# Altium PCB FiltrosGyrator_PCB.PcbDoc
Units mm, origin at the board's own origin, x right, y up, seen from the top; angles counter-clockwise.
Board outline 47.27 x 46.55 mm, 2 copper layers (Top Layer, Bottom Layer); 37 components, 19 nets, 83 pads, 0 vias.
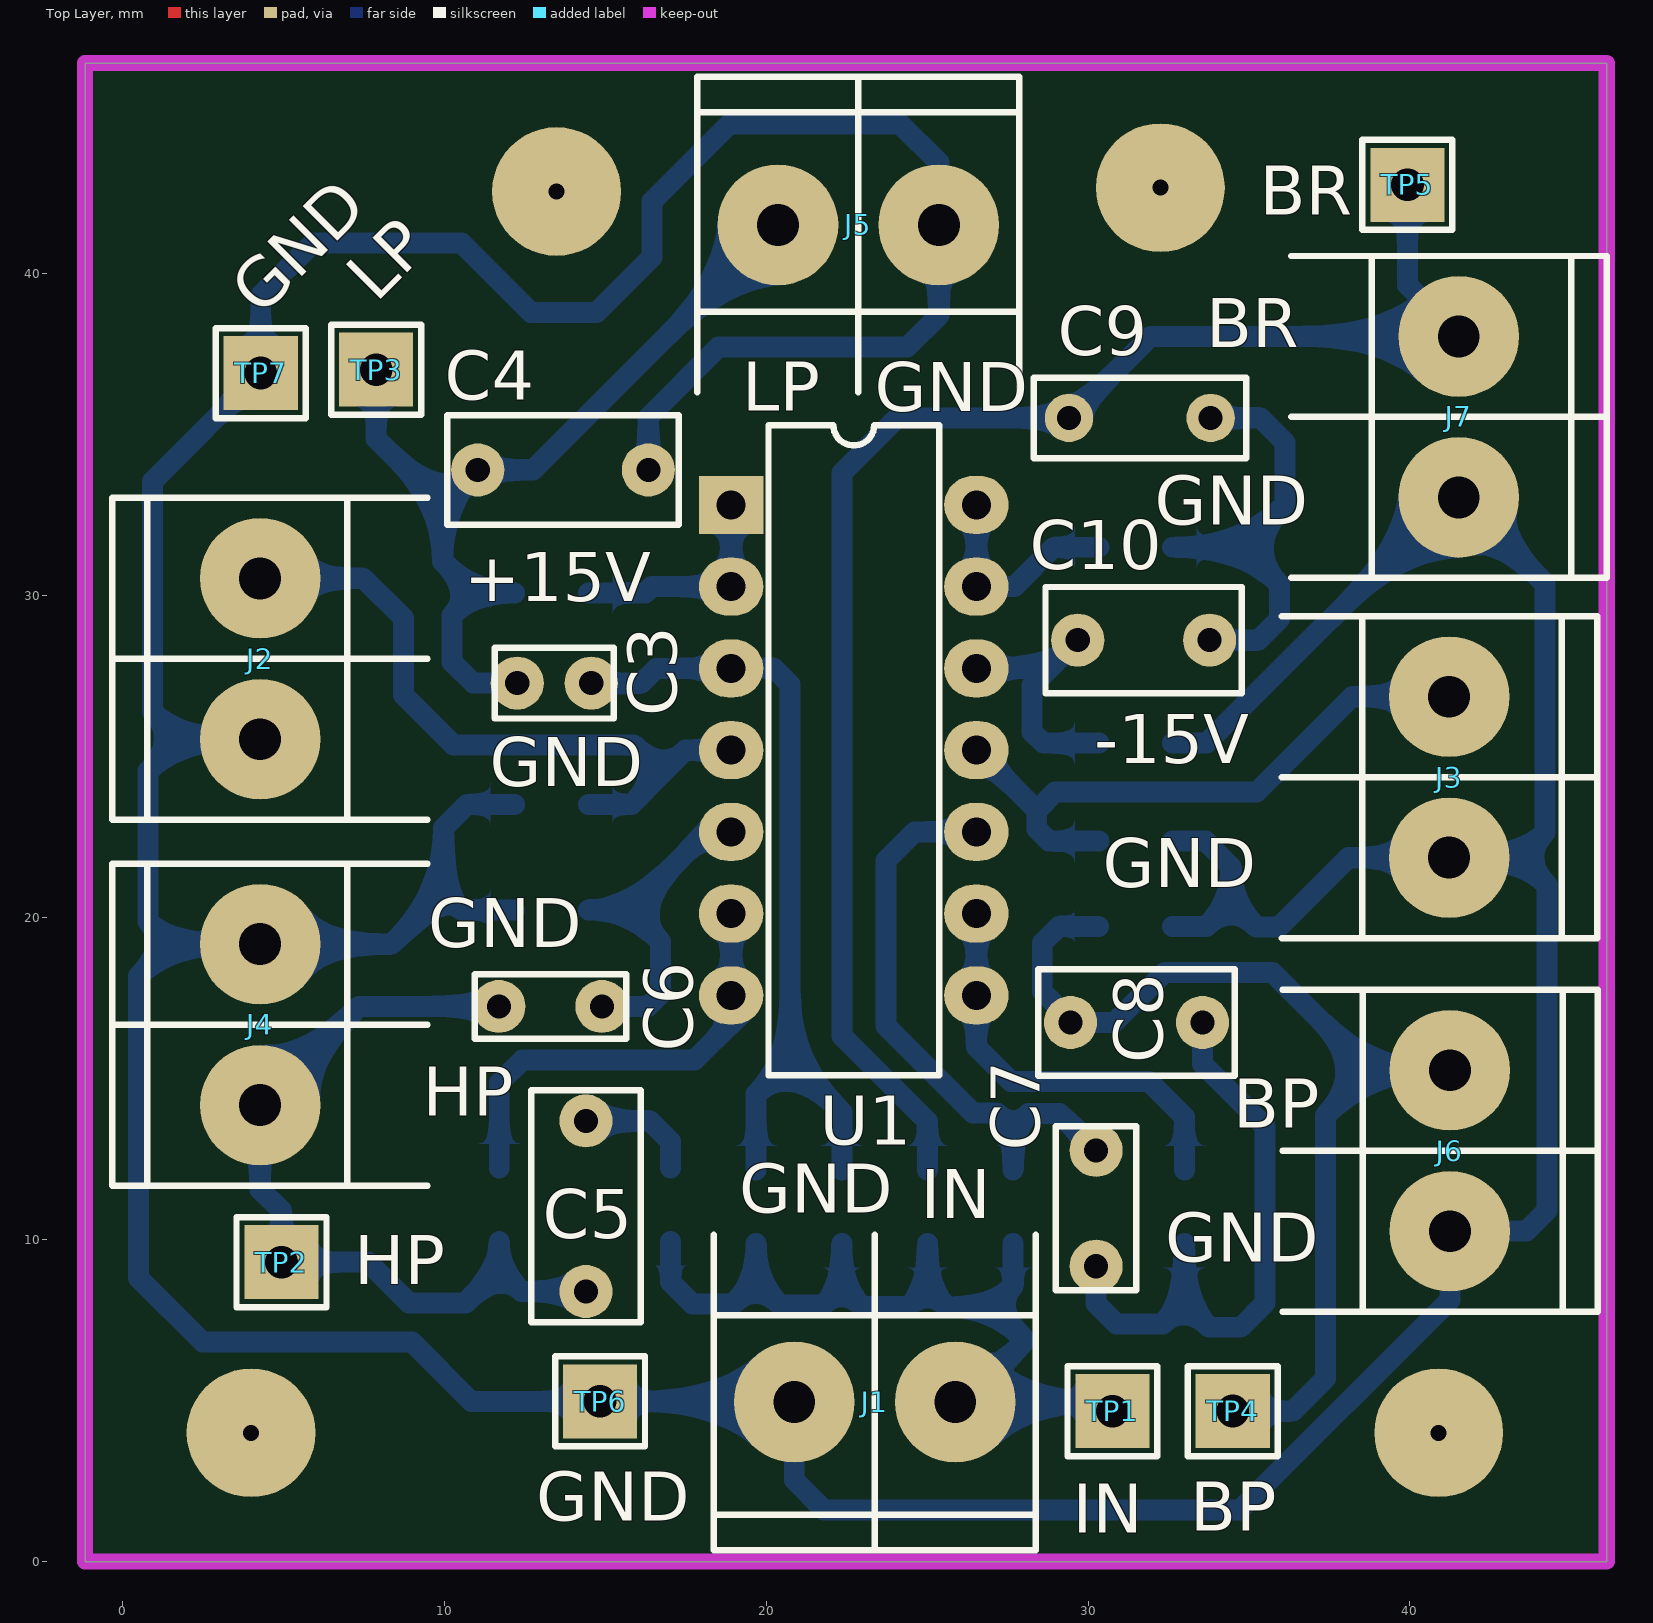
[diagram p0: Top Layer view]
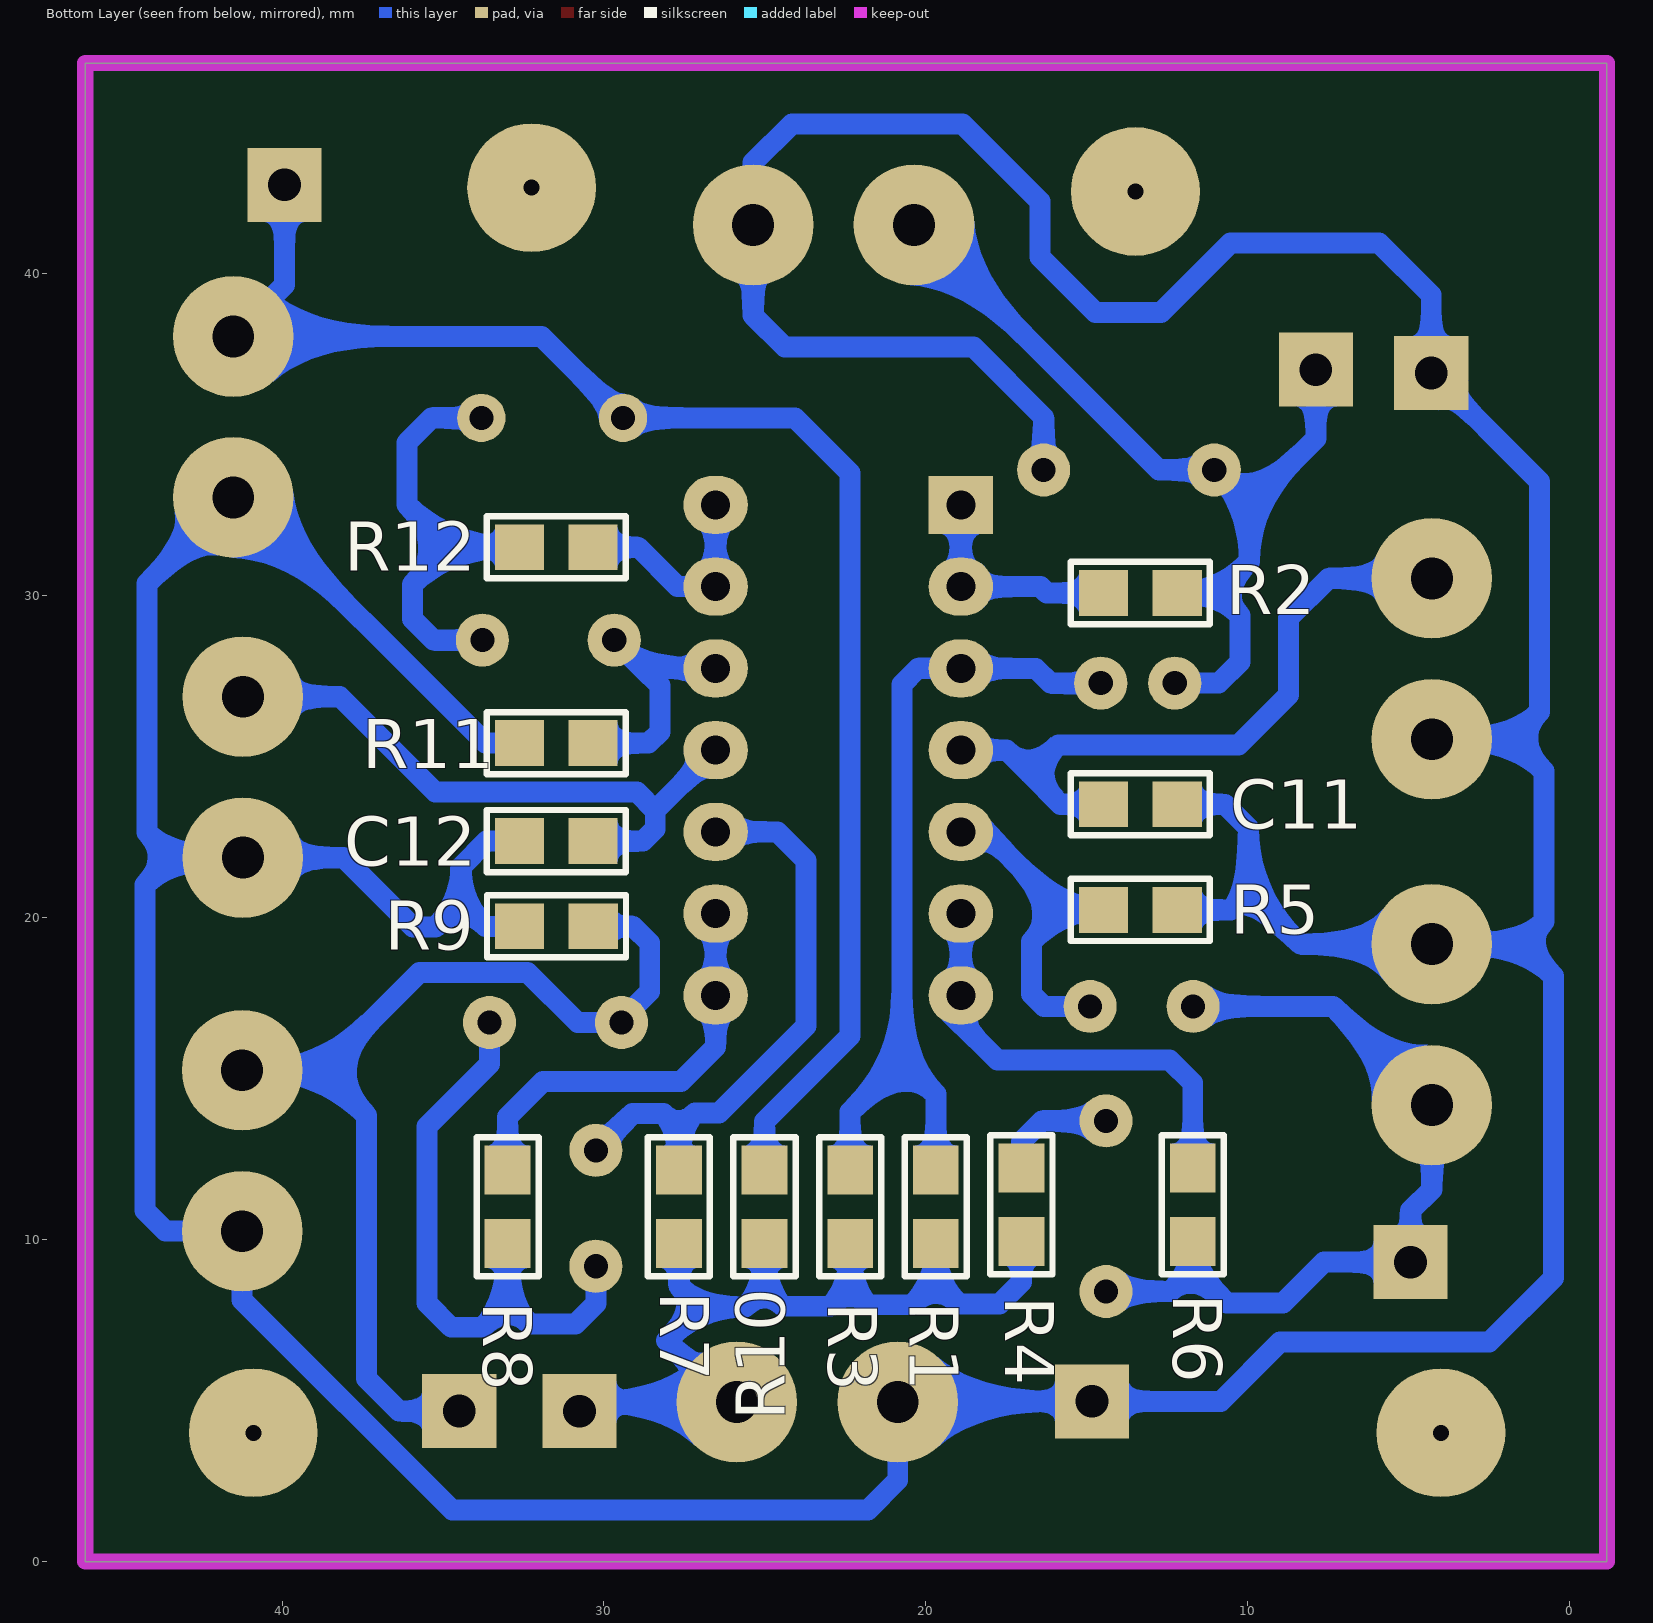
[diagram p1: Bottom Layer view, seen from below]
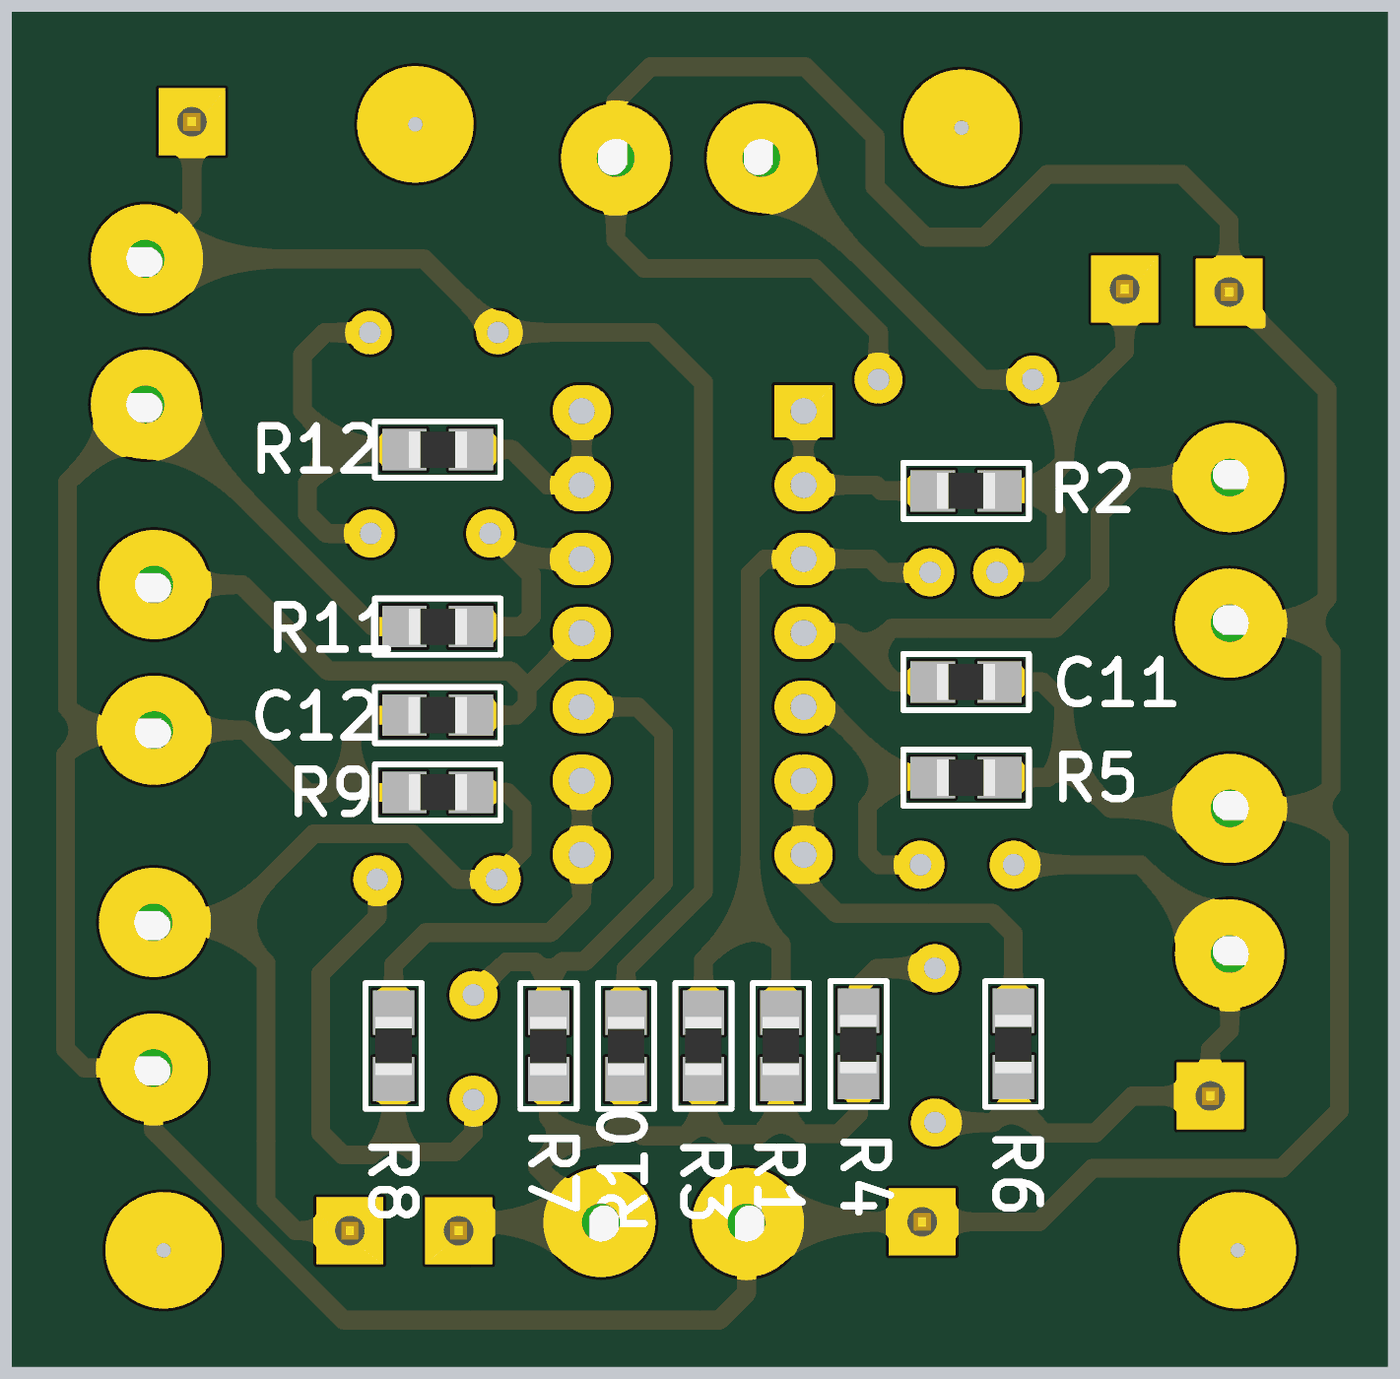
[diagram p2: 3D render of the assembled board from below, using the file's embedded part models]

## Layer stack, top to bottom
Top Solder: solder mask 0.0102, Solder Resist, Dk 3.5
Top Layer: signal copper 0.0356
Dielectric 1: dielectric 0.32, FR-4, Dk 4.8
Bottom Layer: signal copper 0.0356
Bottom Solder: solder mask 0.0102, Solder Resist, Dk 3.5

## Board outline
-1.153,0 46.114,0 46.114,46.548 -1.153,46.548

## Design rules (kind name [scope] priority, off if disabled: settings)
Clearance [All] p1: gap=0.35
PolygonConnect [All] p1: connectstyle=Relief reliefconductorwidth=0.254 reliefentries=4 polygonreliefangle="90 Angle" airgapwidth=0.254
RoutingVias [All] p1: holewidth=0.711 width=1.27 viastyle="Through Hole" minholewidth=0.711 minwidth=1.27 maxholewidth=0.711 maxwidth=1.27
SolderMaskExpansion [All] p1: expansion=0.102
Width [All] p1: maxlimit=0.7 minlimit=0.55 preferedwidth=0.65
30 further rules are at their usual default settings.

## Components (designator, comment, footprint, x,y, rotation, side; value= is the part's Value field where it differs from the comment)
C3 "470pF" CAP_470p_CERAMIC_THT 13.418,27.29 r180 top
C4 "33nF" CAP_33N_FILM_THT 13.691,33.912 r180 top
C5 "33nF" CAP_33N_FILM_THT 14.402,11.04 r270 top
C6 "2.7nF" CAP_2.7n_FILM_THT 13.299,17.246 r0 top
C7 "6.8nF" CAP_6.8n_FILM_THT 30.253,10.973 r270 top
C8 "2.2nF" CAP_8.2n_FILM_THT 31.507,16.745 r180 top
C9 "100nF" CAP_10N_FILM_THT 31.61,35.528 r0 top
C10 "8.2nF" CAP_8.2n_FILM_THT 31.73,28.625 r0 top
C11 "100nF" 0805 13.335,23.525 r180 bottom
C12 "100nF" 0805 31.48,22.382 r180 bottom
J1 "Input" BORNERA2 23.375,4.957 r90 top
J2 "15V" BORNERA2 4.282,28.044 r0 top
J3 "15V" BORNERA2 41.219,24.368 r180 top
J4 "HP_Output" BORNERA2 4.282,16.68 r0 top
J5 "LP_Output" BORNERA2 22.867,41.522 r270 top
J6 "BP_Output" BORNERA2 41.241,12.763 r180 top
J7 "BR_Output" BORNERA2 41.517,35.558 r180 top
R1 "56k 1%" 0805 19.692,11.023 r90 bottom
R2 "1k5 1%" 0805 13.335,30.089 r180 bottom
R3 "56k 1%" 0805 22.352,11.023 r90 bottom
R4 "5k6 1%" 0805 17.031,11.086 r90 bottom
R5 "820k 1%" 0805 13.335,20.243 r0 bottom
R6 "120 1%" 0805 11.71,11.086 r90 bottom
R7 "100k 1%" 0805 27.673,11.02 r90 bottom
R8 "470 1%" 0805 32.994,11.02 r270 bottom
R9 "10k 1%" 0805 31.476,19.734 r180 bottom
R10 "1k 1%" 0805 25.013,11.02 r90 bottom
R11 "300k 1%" 0805 31.48,25.425 r0 bottom
R12 "100 1%" 0805 31.48,31.511 r0 bottom
TP1 "IN" TPTH 30.76,4.671 r0 top
TP2 "HP" TPTH 4.946,9.301 r0 top
TP3 "LP" TPTH 7.886,37.025 r0 top
TP4 "BP" TPTH 34.496,4.675 r0 top
TP5 "BR" TPTH 39.923,42.767 r0 top
TP6 "GND" TPTH 14.841,4.978 r0 top
TP7 "GND" TPTH 4.302,36.92 r0 top
U1 "TL084" J014 22.724,25.206 r270 top

## Footprints (in the part's own frame and the unit in brackets; to place one, negate y for a bottom-side part, rotate by r counter-clockwise, add the part's x,y. Pads: shape width x height; smd on the part's side, far side on the other; paste and mask are expansions set on the pad)
0805 [mil] "Pasivo 0805"
  rect 60x56 smd: 1(-45,0) 2(45,0)
  silkscreen extent -85,-38 85,38, body extent -40,-25 39,25, height 15
BORNERA2 [mm] "Bornera con Tornillos 5mm separación"
  round 3.75 hole 1.3: 1(0,2.5) 2(0,-2.5)
  silkscreen extent -4.6,-5 5.2,5, body extent -3.76,-4.89 3.94,5.61, height 10
CAP_2.7n_FILM_THT [mm] "2.7nF Film THT Capacitor"
  round 1.65 hole 0.75: 1(-1.6,0) 2(1.6,0)
  silkscreen extent -2.35,-1 2.35,1
CAP_6.8n_FILM_THT [mm] "6.8nF Film THT Capacitor"
  round 1.65 hole 0.75: 1(-1.8,0) 2(1.8,0)
  silkscreen extent -2.55,-1.25 2.55,1.25
CAP_8.2n_FILM_THT [mm] "8.2nF Film THT Capacitor"
  round 1.65 hole 0.75: 1(-2.05,0) 2(2.05,0)
  silkscreen extent -3.05,-1.65 3.05,1.65
CAP_10N_FILM_THT [mm] "10nF Film THT Capacitores"
  round 1.5 hole 0.75: 1(-2.2,0) 2(2.2,0)
  silkscreen extent -3.3,-1.25 3.3,1.25
CAP_33N_FILM_THT [mm] "33nF Film THT Capacitor"
  round 1.65 hole 0.75: 1(-2.65,0) 2(2.65,0)
  silkscreen extent -3.6,-1.7 3.6,1.7
CAP_470p_CERAMIC_THT [mm] "470pF Ceramic THT Capacitor"
  round 1.65 hole 0.75: 1(-1.15,0) 2(1.15,0)
  silkscreen extent -1.85,-1.1 1.85,1.1
J014 [mm]
  rect 1.8x2 hole 0.9: 1(-7.62,-3.81)
  oval 1.8x2 hole 0.9: 2(-5.08,-3.81) 3(-2.54,-3.81) 4(0,-3.81) 5(2.54,-3.81) 6(5.08,-3.81) 7(7.62,-3.81) 8(7.62,3.81) 9(5.08,3.81) 10(2.54,3.81) 11(0,3.81) 12(-2.54,3.81) 13(-5.08,3.81) 14(-7.62,3.81)
  silkscreen extent -10.1,-2.65 10.1,2.65
TPTH [mm]
  rect 2.3x2.3 hole 1.016: 1(0,0)
  silkscreen extent -1.4,-1.4 1.4,1.4, body extent -1.27,-1.27 1.27,1.27, height 6.04

## Part data
C3 C4 C5 C6 C7 C8 C9 C10 C11 C12: library part CAP
J1 J4 J5 J6 J7: library part "BORNERA 2"
J2 J3: library part BATERIA, "BATERIA"
R1 R2 R3 R4 R5 R6 R7 R8 R9 R10 R11 R12: library part RES
TP1 TP2 TP3 TP4 TP5 TP6 TP7: library part TP
U1: library part TL084J, "JFET-Input Operational Amplifier"

## Free pads (board coordinates)
  round 4 hole 0.5: 2(4,4) 2(13.491,42.562) 2(32.249,42.68) 2(40.893,4)

## Nets (pads, with @x,y where several pads share a name; then routed paths per layer and width w, separated by ;. In a path a pad name is that pad's centre, name@x,y a point inside that pad or via, vN(x,y) a via of type N, cw(c..) or ccw(c..) an arc to the next point about the centre after c; other vN are vias at no path point)
BP_OUTPUT: C8.2 J6.2 R9.2 TP4.1 | length 31.8
  Bottom Layer w0.65: C8.2@29.43,16.852 28.578,17.704 28.578,19.214 29.098,19.734 R9.2 ; C8.2 30.815,16.745 32.375,18.306 35.737,18.306 38.779,15.263 ; TP4.1 36.371,4.675 37.379,5.683 37.379,13.863 38.779,15.263 ; J6.2 38.779,15.263
BR_OUTPUT: C9.1 J7.2 R10.2 TP5.1 | length 49
  Bottom Layer w0.65: R10.2 25.013,13.669 22.356,16.326 22.356,33.82 24.064,35.528 C9.1 31.941,38.058 J7.2 39.923,39.652 TP5.1
GND: C4.1 C11.2 C12.1 J1.1 J2.2 J3.1 J4.1 J5.1 J6.1 J7.1 R5.1 R9.1 R11.2 TP6.1 TP7.1 | length 200.1
  Bottom Layer w0.65: J2.2 1.789,25.544 ; R5.1 10.529,20.243 9.978,20.794 ; C11.2 10.711,23.525 9.978,22.791 9.978,20.794 ; C4.1 16.341,35.548 18.526,37.732 24.384,37.732 25.367,38.716 J5.1 25.367,43.459 24.165,44.661 18.865,44.661 16.461,42.257 16.461,40.531 14.735,38.805 12.701,38.805 10.543,40.963 5.92,40.963 4.302,39.344 TP7.1 0.935,33.554 0.935,26.397 1.789,25.544 ; R9.1 33.682,19.734 34.446,20.498 ; C12.1 33.645,22.382 34.446,21.581 34.446,20.498 ; R11.2 33.686,25.425 41.319,33.058 J7.1 44.196,30.379 44.196,22.646 43.417,21.868 ; 1.496,19.18 0.509,18.193 0.509,8.807 2.5,6.817 9.001,6.817 10.84,4.978 TP6.1 20.853,4.978 J1.1 20.875,2.533 21.805,1.603 34.713,1.603 41.241,8.131 J6.1 43.622,10.263 44.26,10.901 44.26,21.025 43.417,21.868 ; 1.496,19.18 J4.1 8.363,19.18 9.978,20.794 ; 1.496,19.18 0.797,19.879 0.797,24.553 1.789,25.544 ; 34.446,20.498 35.236,19.707 35.936,19.707 38.096,21.868 J3.1 43.417,21.868
HP_OUTPUT: C5.2 C6.1 J4.2 R6.1 TP2.1 | length 25.4
  Bottom Layer w0.65: C6.1 7.348,17.246 J4.2 4.282,11.565 4.946,10.901 TP2.1 7.631,9.301 8.904,8.028 10.657,8.028 11.71,9.081 ; R6.1 11.71,9.081 ; C5.2 12.402,8.39 11.71,9.081
INPUT: J1.2 R1.1 R3.1 R4.1 R7.1 R10.1 TP1.1 | length 28.4
  Bottom Layer w0.65: R4.1 17.031,8.681 17.708,8.004 18.987,8.004 19.692,8.708 ; R1.1 19.692,8.708 ; R3.1 22.352,8.547 ; R10.1 25.013,8.506 ; J1.2 J1.2@26.144,4.957 ; R7.1 27.673,8.561 27.018,7.907 ; TP1.1 30.474,4.957 J1.2@26.144,4.957 ; 19.692,8.708 20.421,7.979 21.785,7.979 22.352,8.547 ; 22.352,8.547 22.968,7.931 24.438,7.931 25.013,8.506 ; 25.013,8.506 25.612,7.907 27.018,7.907 ; J1.2@26.144,4.957 28.056,6.869 27.018,7.907
LP_OUTPUT: C3.2 C4.2 J5.2 R2.2 TP3.1 | length 28.2
  Bottom Layer w0.65: TP3.1 7.886,34.892 9.954,32.824 ; R2.2 10.938,30.089 ; C3.2 10.902,27.29 10.242,27.95 10.242,29.393 10.938,30.089 ; J5.2 12.758,33.912 C4.2 9.954,32.824 ; 9.954,32.824 9.954,31.073 10.938,30.089
NetC3_1: C3.1 R1.2 R3.2 U1.3 | length 26.2
  Bottom Layer w0.65: C3.1 16.131,27.29 16.587,27.746 U1.3 20.254,27.746 20.748,27.252 20.748,15.578 ; R1.2 19.692,14.522 20.748,15.578 ; R3.2 22.352,13.973 20.748,15.578
NetC5_1: C5.1 R4.2 | length 3.7
  Bottom Layer w0.65: C5.1 16.388,13.69 17.031,13.047 R4.2
NetC6_2: C6.2 R5.2 U1.5 | length 10.4
  Bottom Layer w0.65: R5.2 15.74,20.243 ; C6.2 16.337,17.246 16.719,17.628 16.719,19.263 15.74,20.243 ; U1.5 18.164,22.666 15.74,20.243
NetC7_1: C7.1 R7.2 U1.10 | length 18.1
  Bottom Layer w0.65: U1.10 24.609,22.666 23.723,21.781 23.723,16.634 26.427,13.93 27.173,13.93 27.673,13.43 ; R7.2 27.673,13.43 ; C7.1 29.112,13.914 28.157,13.914 27.673,13.43
NetC7_2: C7.2 C8.1 R8.2 | length 18.9
  Bottom Layer w0.65: C7.2 30.253,8.016 30.886,7.382 32.326,7.382 32.994,8.05 ; R8.2 32.994,8.05 ; C8.1 33.557,15.453 35.496,13.514 35.496,8.029 34.746,7.279 33.765,7.279 32.994,8.05
NetC9_2: C9.2 C10.2 R12.2 | length 13.8
  Bottom Layer w0.65: R12.2 34.797,31.511 ; C10.2 35.292,28.625 35.954,29.287 35.954,30.354 34.797,31.511 ; C9.2 35.352,35.528 36.123,34.757 36.123,32.837 34.797,31.511
NetC10_1: C10.1 R11.1 U1.12 | length 7.9
  Bottom Layer w0.65: U1.12 28.801,27.746 ; C10.1 28.801,27.746 ; R11.1 28.614,25.425 28.264,25.774 28.264,27.21 28.801,27.746
NetR2_1: R2.1 U1.1 U1.2 | length 7.1
  Bottom Layer w0.65: R2.1 16.247,30.089 16.444,30.286 U1.2 U1.1
NetR6_2: R6.2 U1.6 U1.7 | length 14
  Bottom Layer w0.65: R6.2 11.71,14.862 12.426,15.578 17.781,15.578 18.914,16.71 U1.7 U1.6
NetR8_1: R8.1 U1.8 U1.9 | length 13.1
  Bottom Layer w0.65: U1.9 U1.8 26.534,15.991 27.611,14.914 31.895,14.914 32.994,13.815 R8.1
NetR12_1: R12.1 U1.13 U1.14 | length 6.9
  Bottom Layer w0.65: U1.14 U1.13 27.711,30.286 28.936,31.511 R12.1
VCC: C11.1 J2.1 U1.4 | length 21.5
  Bottom Layer w0.65: J2.1 7.495,30.544 8.73,29.309 8.73,26.924 10.283,25.371 15.886,25.371 16.773,24.483 ; C11.1 15.814,23.525 16.773,24.483 ; U1.4 17.496,25.206 16.773,24.483
VEE: C12.2 J3.2 U1.11 | length 19.6
  Bottom Layer w0.65: U1.11 28.409,23.331 ; C12.2 28.788,22.382 28.409,22.761 28.409,23.331 ; J3.2 38.208,26.868 35.243,23.903 28.98,23.903 28.409,23.331

## Keep-outs
Keep-Out Layer:
  the board outline again, w0.5

## Silkscreen, mask and mechanical layers (free items; w line width, h text height)
Top Overlay:
  text "BR" at 33.679,37.722 h1.52
  text "LP" at 19.261,35.745 h1.52
  text "GND" at 23.373,35.728 h1.52
  text "GND" at 32.07,32.215 h1.52
  text "+15V" at 10.629,29.825 h1.52
  text "-15V" at 30.189,24.804 h1.52
  text "GND" at 11.416,24.079 h1.52
  text "GND" at 30.454,20.945 h1.52
  text "GND" at 9.507,19.08 h1.52
  text "HP" at 9.337,13.842 h1.52
  text "BP" at 34.516,13.471 h1.52
  text "GND" at 19.159,10.831 h1.52
  text "IN" at 24.804,10.668 h1.52
  text "GND" at 32.405,9.308 h1.52